# EAGLE board CC2530-CP2102-USB-V02-006 (EAGLE 9.2.2)
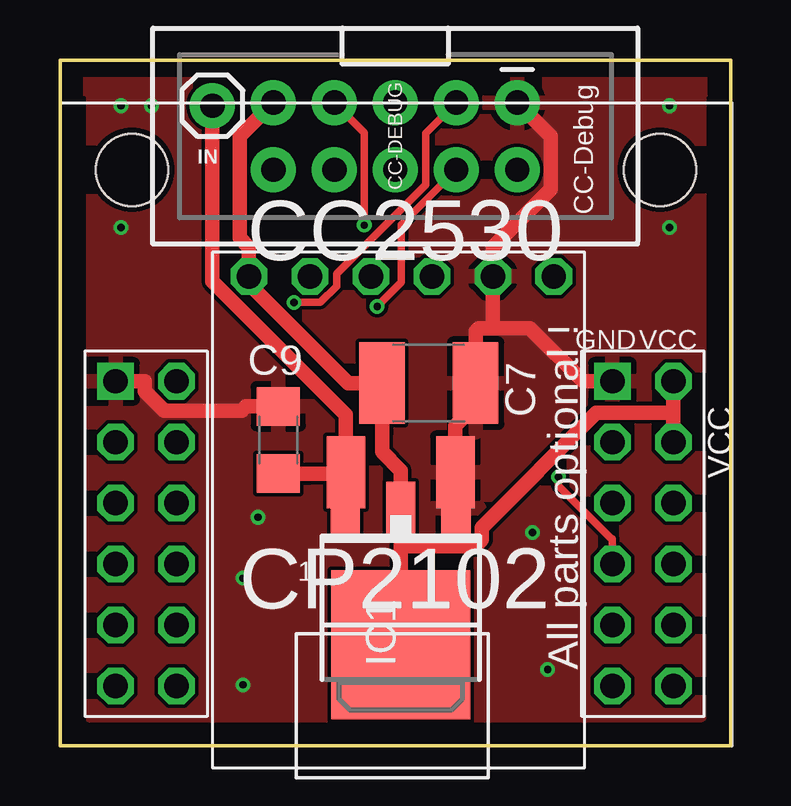
[diagram p0: board, top side]
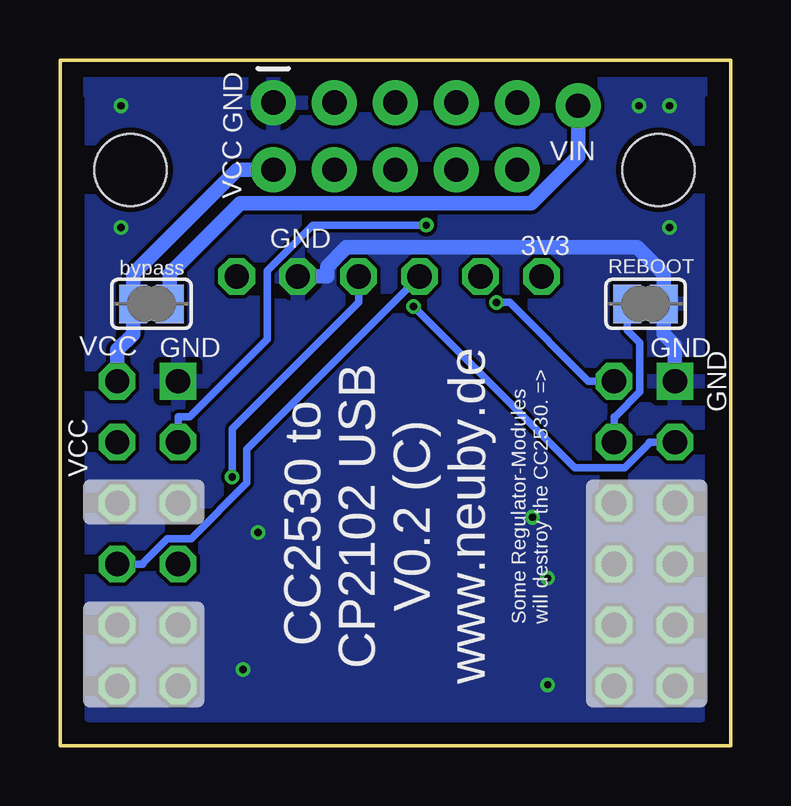
[diagram p1: board, bottom side, seen from below]

Size 27.94 x 28.57 mm. Coordinates in mm from the lower left corner, seen from the top.
Outline: 0,0 0,28.57 27.94,28.57 27.94,0 0,0
Copper layers (1*16): Top 0.035mm / dielectric 1.5mm / Bottom 0.035mm
Design rules "SeeedStudio_2layer_DRU_no_angle_20140221": minimum track width 6mil, minimum drill 12mil, track to track 6mil, track to pad 6mil, pad to pad 6mil, via to via 6mil, smd to smd 0mil, copper to edge 10mil, drill to drill 10mil, minimum pad ring 10mil, minimum via ring 6mil, stop-mask expansion 2mil, vias tented up to drill 100mil, thermal gap 10mil
Net classes: 0 default: width 0.305 mm; 1 PWR: width 0.61 mm
Holes 3 mm at 3,24 25,24
tRestrict: area 0,0 to 1,27; area 27,0 to 28,27; area 0.6,27.9 to 27.6,28.9
bRestrict: area 0,0 to 1,27; area 27,0 to 28,27; area 0.3,27.9 to 27.3,28.9

## Footprints (pad centres in the part's own frame; a part is rotated, then mirrored left to right if it is on the bottom)
C1812 = smd 1.9 x 3.4: 1 -1.95,0; 2 1.95,0
C1206 = smd 1.6 x 1.8: 1 -1.4,0; 2 1.4,0
2X5-SHROUDED_LOCK = drill 1.016 pad 1.88: 1 -1.397,5.08; 2 1.397,5.08; 3 -1.397,2.54; 4 1.397,2.54; 5 -1.397,0; 6 1.397,0; 7 -1.397,-2.54; 8 1.397,-2.54; 9 -1.397,-5.08; 10 1.397,-5.08
SJ = smd 1.168 x 1.6: 1 -0.762,0; 2 0.762,0
DPACK = smd 1.6 x 3: 1 -2.28,-4.8; 3 2.28,-4.8 | smd 5.8 x 6.2: 4 0,2.38
SOT223 = smd 1.219 x 2.235: 1 -2.311,-3.099; 2 0,-3.099; 3 2.311,-3.099 | smd 3.6 x 2.2: TAB 0,3.099
1X01 = drill 1.016 pad 1.88: 1 0,0
CP2101-BEAKOUT = drill 1.016 octagon: 3V3 13.97,1.016; 5V 1.27,1.016; DTR 11.43,1.016; GND 3.81,1.016; RXD 8.89,1.016; TXD 6.35,1.016
CC2530_DIL = drill 1.016 square: GND 2.316,15.19; GND2 23.017,15.19 | drill 1.016 octagon: P0_0 23.017,10.11; P0_1 25.557,10.11; P0_2\U_RX 23.017,7.57; P0_3\U_TX 25.557,7.57; P0_4 23.017,5.03; P0_5 25.557,5.03; P0_6 23.017,2.49; P0_7 25.557,2.49; P1_0 4.856,2.49; P1_1 2.316,2.49; P1_2 4.856,5.03; P1_3 2.316,5.03; P1_4 4.856,7.57; P1_5 2.316,7.57; P1_6 4.856,10.11; P1_7 2.316,10.11; P2_0 4.856,12.65; P2_1 2.316,12.65; P2_2 4.856,15.19; RST 23.017,12.65; VCC 25.557,15.19; VCC2 25.557,12.65

## Placement (x,y rotation side)
C7  [C1812]  15.37,15.11 180 top
C9  0.1uF  [C1206]  9.1,12.74 90 top
CC-DEBUG  [2X5-SHROUDED_LOCK]  13.97,25.4 270 top
EXT  [SJ]  24.13,18.41 0 bottom
IC1  LD117ADT50TR  [DPACK]  14.19,6.59 180 top
IC6  LM1117MPX-ADJ  [SOT223]  14.19,6.79 180 top
IN  [1X01]  6.35,26.67 0 top
REBOOT  [SJ]  3.54,18.41 180 bottom
U$1  CP2101  [CP2101-BEAKOUT]  21.84,20.57 180 top
U$3  CC2530_MODULE  [CC2530_DIL]  0,0 0 top

## Library data of the parts
C7 C9 = rcl; SPICEPREFIX: C
CC-DEBUG = SparkFun-Connectors; PROD_ID: CONN-08671; SF_ID: PRT-08506
EXT REBOOT = jumper
IC1 = v-reg
IC6 = lm1117
IN = SparkFun-Connectors
U$1 = Martin-USB-V001
U$3 = Martin-Communication-V4

## Nets
5V: U$1.5V
CS: CC-DEBUG.5
DC: CC-DEBUG.3 U$3.P2_2
DD: CC-DEBUG.4 U$3.P2_1
GND [PWR]: C7.1 C9.2 CC-DEBUG.1 IC1.1 IC6.1 REBOOT.1 U$1.GND U$3.GND U$3.GND2
IN [PWR]: C9.1 EXT.2 IC1.3 IC6.3 IN.1
MISO: CC-DEBUG.10
MOSI: CC-DEBUG.8
N$1: REBOOT.2 U$3.P2_0
N$2: U$1.TXD U$3.P0_2\U_RX
N$3: U$1.RXD U$3.P0_3\U_TX
RST: CC-DEBUG.7 U$3.RST
SCLK: CC-DEBUG.6
VCC [PWR]: C7.2 CC-DEBUG.2 CC-DEBUG.9 EXT.1 IC1.4 IC6.2 IC6.TAB U$1.3V3 U$3.VCC U$3.VCC2

## Tracks (layer width: path | path; a pad name or v marks a point on that pad's centre or on a via)
DC  (via drill 0.3 pad 0.61)
  Top 0.305: v9.75,18.48 10.84,18.48 11.52,19.16 11.52,19.66 15.24,23.38 15.24,25.53 CC-DEBUG.3
  Bottom 0.305: U$3.P2_2 5.92,15.19 9.21,18.48 v9.75,18.48
DD  (via drill 0.3 pad 0.61)
  Top 0.305: v13.21,18.3 14.22,19.31 14.22,21.72 CC-DEBUG.4
  Bottom 0.305: U$3.P2_1 3.38,12.65 3.38,12.61 4.41,11.58 6.49,11.58 v13.21,18.3
GND  (via drill 0.3 pad 0.61)
  Top 0.61: C9.2 7.74,14.14 7.57,13.97 4.35,13.97 3.54,14.78 3.54,15.19 U$3.GND | 18.03,17.41 17.45,17.41 17.32,17.27 C7.1 17.32,14.19 16.47,13.35 IC1.1 16.47,9.92 IC6.1 | 18.03,17.41 19.58,17.41 21.8,15.19 U$3.GND2 | 18.03,17.41 18.03,18.34 U$1.GND 18.03,20.78 20.45,23.19 20.45,25.4 CC-DEBUG.1
  Bottom 0.61: U$1.GND 16.82,19.56 16.82,19.97 16,20.78 3.88,20.78 2.78,19.67 REBOOT.1 2.78,17.79 2.78,17.16 2.32,16.7 U$3.GND
  other vias: 2.54,26.67 3.81,26.67 2.54,21.59 8.26,9.53 19.68,8.89 25.4,26.67 25.4,21.59 20.32,3.17 7.62,2.54 7.62,6.99
  pour Top: 1.27,1.27 1.27,27.94 26.67,27.94 26.67,1.27
  pour Bottom: 1.27,27.94 26.67,27.94 26.67,1.27 1.27,1.27
IN
  Top 0.61: 11.88,11.34 IC6.3 | 11.88,11.34 11.88,11.36 IC1.3 11.91,13.79 6.35,19.35 IN.1 | 11.88,11.34 10.45,11.34 C9.1
  Bottom 0.61: IN.1 6.35,24.57 8.31,22.61 20.43,22.61 23.37,19.67 EXT.2
N$1
  Bottom 0.305: REBOOT.2 4.3,17.31 3.79,16.79 3.79,14.74 4.81,13.72 4.86,13.72 U$3.P2_0
N$2  (via drill 0.3 pad 0.61)
  Top 0.305: U$3.P0_2\U_RX 23.02,8.64 22.98,8.64 20.77,10.85 v20.77,11.21
  Bottom 0.305: U$1.TXD 15.49,18.49 20.77,13.22 v20.77,11.21
N$3
  Bottom 0.305: U$1.RXD 20.16,12.36 20.16,10.95 22.47,8.64 23.46,8.64 24.49,7.61 24.49,7.57 U$3.P0_3\U_TX
RST  (via drill 0.3 pad 0.61)
  Top 0.305: CC-DEBUG.7 12.68,25.55 v12.68,21.69
  Bottom 0.305: v12.68,21.69 17.41,21.69 19.3,19.8 19.3,16.95 22.53,13.72 23.02,13.72 U$3.RST
VCC
  Top 0.61: 14.19,8.32 14.19,7.76 IC1.4 IC6.TAB | 25.56,13.87 22.35,13.87 17.57,9.09 17.57,8.59 17.3,8.32 14.19,8.32 | 25.56,13.87 U$3.VCC | U$3.VCC2 25.56,13.87 | 14.19,8.32 IC6.2 14.19,11.47 13.42,12.24 13.42,12.96 C7.2 12.01,15.11 7.87,19.25 U$1.3V3 7.87,20.78 7.49,21.16 7.49,25.4 CC-DEBUG.9
  Bottom 0.61: U$3.VCC 25.56,16.49 24.89,17.16 EXT.1 24.89,19.67 20.56,24 CC-DEBUG.2

## Text on the board
tNames: CC-Debug | GND | VCC | VCC | 1 | All parts optional !
bNames: GND | VIN | VCC | 3V3 | GND | bypass | VCC | GND | GND | GND | VCC | CC2530 to / CP2102 USB / V0.2 (C) / www.neuby.de | Some Regulator-Modules / will destroy the CC2530. =>